# Altium PCB PanelDriver.PcbDoc
Units mm, origin at the board's own origin, x right, y up, seen from the top; angles counter-clockwise.
Board outline 65 x 44 mm, 2 copper layers (Top Layer, Bottom Layer), stack 1.58 mm thick; 74 components, 112 nets, 340 pads, 177 vias.
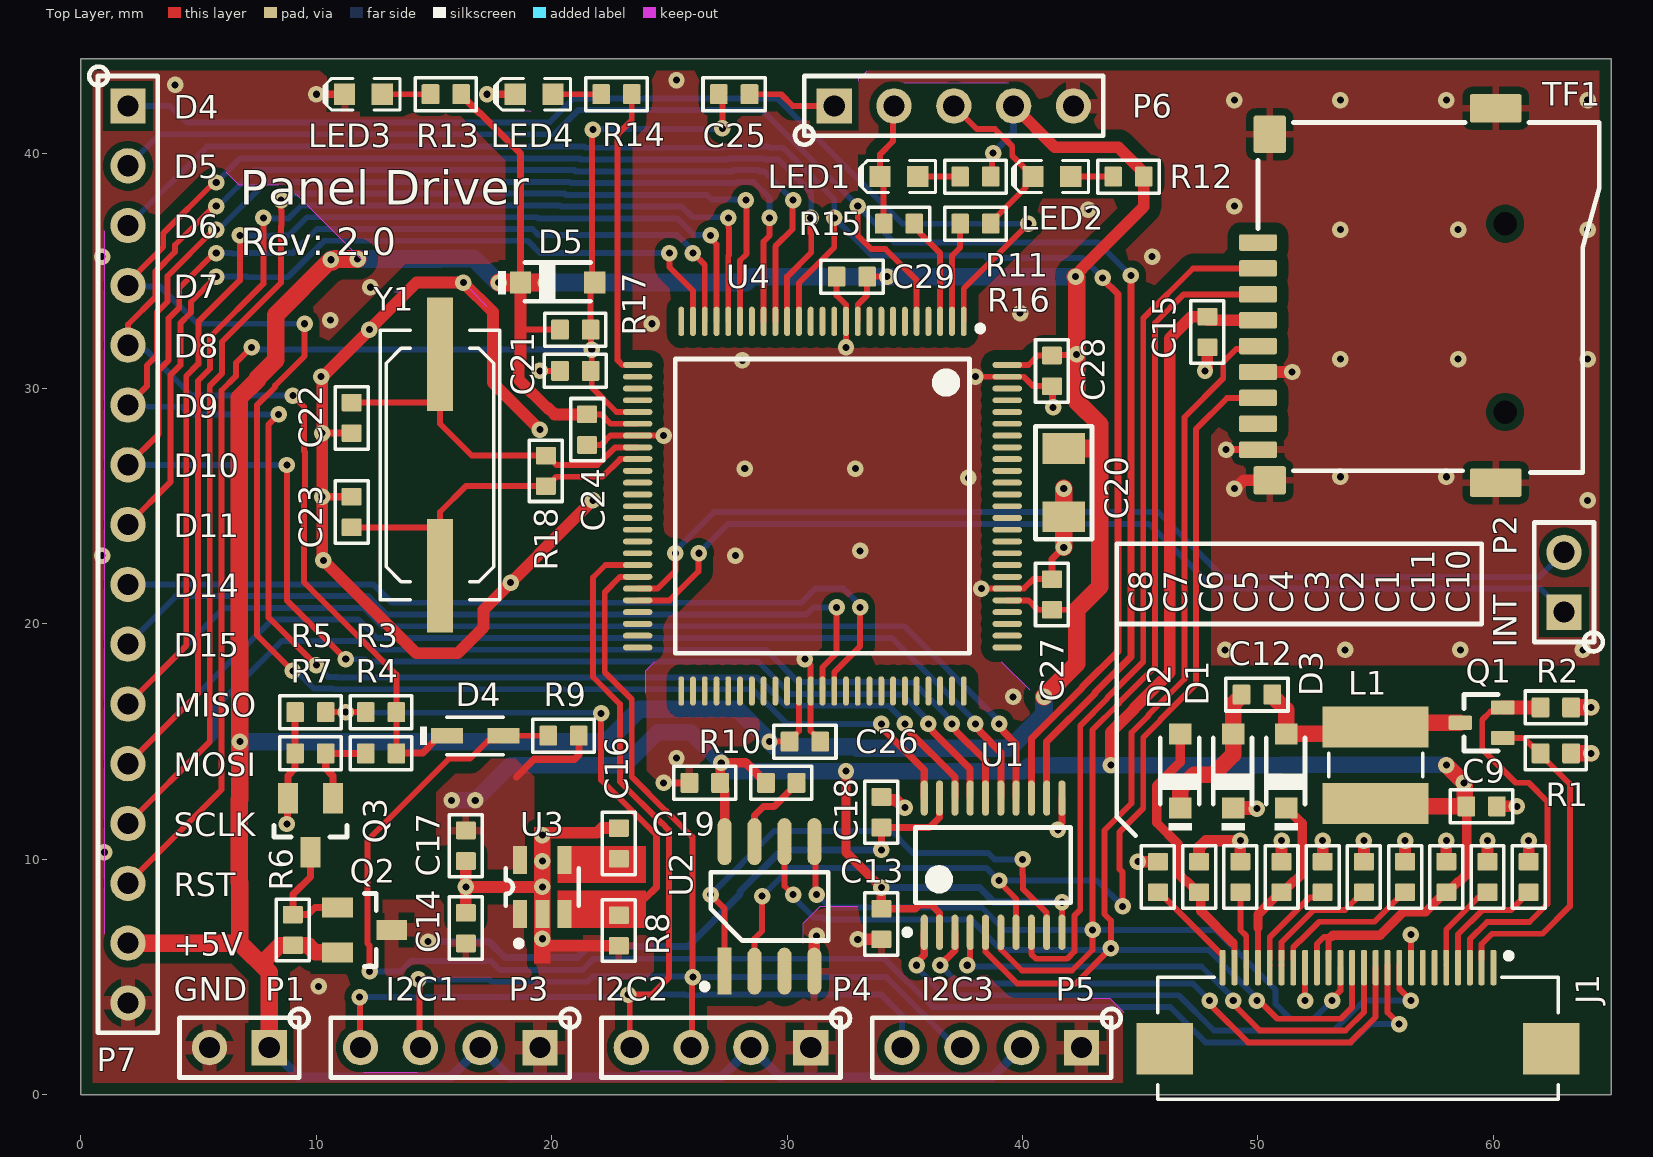
[diagram p0: Top Layer view]
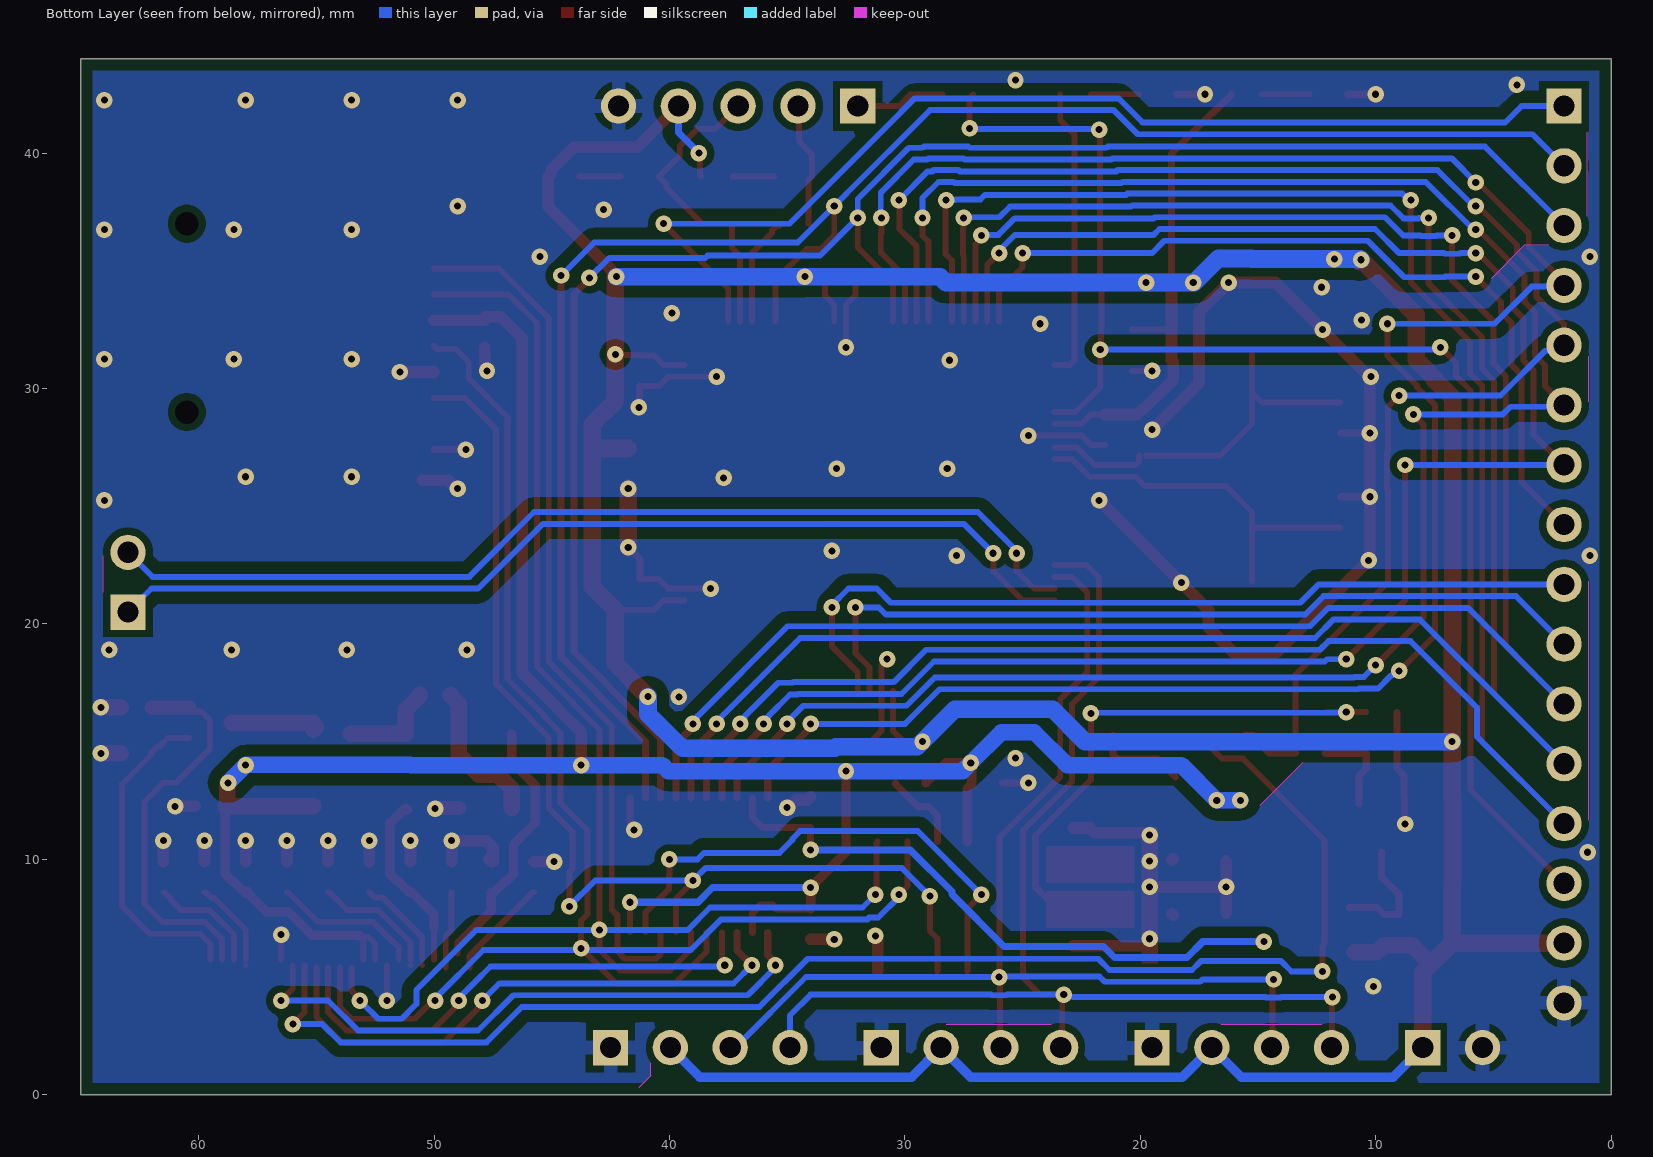
[diagram p1: Bottom Layer view, seen from below]
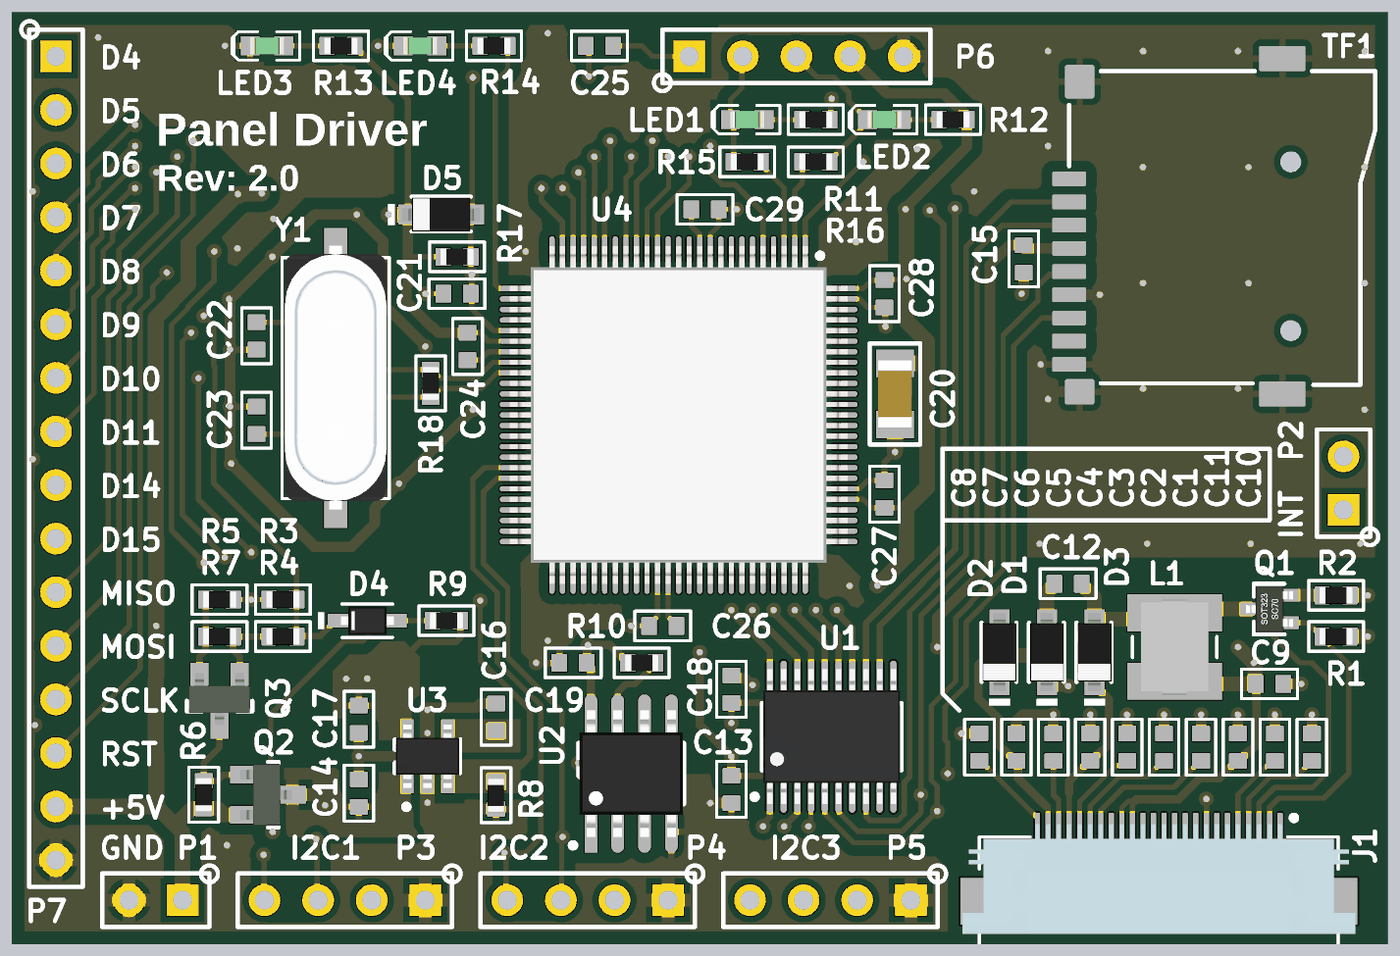
[diagram p2: 3D render of the assembled board from above, using the file's embedded part models]

## Layer stack, top to bottom
Top Solder: solder mask 0.01, Solder Resist, Dk 3.5
Top Layer: signal copper 0.035
Dielectric 1: core 1.51, FR-4, Dk 4.2
Bottom Layer: signal copper 0.035
Bottom Solder: solder mask 0.01, Solder Resist, Dk 3.5

## Board outline
0,0 0,44 65,44 65,0

## Design rules (kind name [scope] priority, off if disabled: settings)
BoardOutlineClearance BoardOutlineClearance_Exceptions [IsKeepOut or IsText or OnSilkscreen] p1: gap=0 ignorepadtopadclearanceinfootprint=FALSE
BoardOutlineClearance [All] p2: gap=0.5 ignorepadtopadclearanceinfootprint=FALSE
Clearance Clearance_KeepOut [IsKeepOut] p1: gap=0 ignorepadtopadclearanceinfootprint=FALSE
Clearance Clearance_All [All] p2: gap=0.3 ignorepadtopadclearanceinfootprint=TRUE except(0.25: Arc-Arc Arc-Track Arc-SMDPad Track-Track Track-SMDPad; 0.5: Track-Poly SMDPad-Poly)
ComponentClearance [All] p1: gap=0.25 collisioncheckmode=3 verticalgap=0.25 showdistances=FALSE
Height [All] p1: minheight=0 maxheight=100 prefheight=12.7
HoleSize [All] p1: absolutevalues=TRUE maxlimit=5 minlimit=0.3 maxpercent=80.000 minpercent=20.000
HoleToHoleClearance [All] p1: gap=0 allowstackedmicrovias=TRUE
MinimumSolderMaskSliver [All] p1: minsoldermaskwidth=0.099
PolygonConnect PolygonConnect_Direct [InComponentClass('Direct')] p1: connectstyle=Direct reliefconductorwidth=0.6 reliefentries=4 polygonreliefangle="90 Angle" airgapwidth=0.3
PolygonConnect PolygonConnect_Power [InComponentClass('Power')] p2: thpad.connectstyle=Relief thpad.reliefconductorwidth=0.6 thpad.reliefentries=4 thpad.polygonreliefangle="90 Angle" thpad.airgapwidth=0.3 smdpad.connectstyle=Relief smdpad.reliefconductorwidth=0.6 smdpad.reliefentries=4 smdpad.polygonreliefangle="90 Angle" smdpad.airgapwidth=0.3 via.connectstyle=Direct via.reliefconductorwidth=1 via.reliefentries=4 via.polygonreliefangle="90 Angle" via.airgapwidth=1
PolygonConnect PolygonConnect_All [All] p3: thpad.connectstyle=Relief thpad.reliefconductorwidth=0.3 thpad.reliefentries=4 thpad.polygonreliefangle="90 Angle" thpad.airgapwidth=0.3 smdpad.connectstyle=Relief smdpad.reliefconductorwidth=0.3 smdpad.reliefentries=4 smdpad.polygonreliefangle="90 Angle" smdpad.airgapwidth=0.3 via.connectstyle=Direct via.reliefconductorwidth=1 via.reliefentries=4 via.polygonreliefangle="90 Angle" via.airgapwidth=1
RoomDefinition PanelDriver [InComponentClass('PanelDriver')] p1: confinementstyle=ConfineIn formatcopy=TRUE lockcomponents=FALSE outline 88,-35 -12,-35 -12,65 88,65
RoutingVias [All] p1: holewidth=0.3 width=0.7 viastyle="Through Hole" minholewidth=0.3 minwidth=0.7 maxholewidth=0.3 maxwidth=0.7
SilkToSilkClearance [All] p1: silktosilkclearance=0.1
SilkToSolderMaskClearance [IsPad] p1: minsilkscreentomaskgap=0.1 clearancetoexposedcopper=TRUE
SolderMaskExpansion [All] p1: expansion=0.05 istentingtop=FALSE
Width [All] p1: maxlimit=10 minlimit=0.25 preferedwidth=0.3
23 further rules are at their usual default settings.

## Classes and differential pairs
net class Power: 3.3V +5 GND VCC
component class Power: C6 C12 L1 P1 P2 P3 P4 P5 P6 P7 Q2
component class Direct: U3

## Components (designator, comment, footprint, x,y, rotation, side; value= is the part's Value field where it differs from the comment)
C1 "100nF" C0603 58,9.25 r90 top
C2 "1uF" C0603 56.25,9.25 r90 top
C3 "1uF" C0603 54.5,9.25 r90 top
C4 "1uF" C0603 52.75,9.25 r90 top
C5 "1uF" C0603 51,9.25 r90 top
C6 "1uF" C0603 49.25,9.25 r90 top
C7 "1uF" C0603 47.5,9.25 r90 top
C8 "1uF" C0603 45.75,9.25 r90 top
C9 "4.7uF" C0603 59.5,12.25 r0 top
C10 "1uF" C0603 61.5,9.25 r90 top
C11 "1uF" C0603 59.75,9.25 r90 top
C12 "100nF" C0603 49.95,17 r0 top
C13 "100nF" C0603 34,7.25 r270 top
C14 "1uF" C0603 16.35,7.075 r270 top
C15 "100n" C0603 47.85,32.4 r90 top
C16 "22nF" C0603 22.85,10.675 r270 top
C17 "10uF" C0603 16.35,10.575 r90 top
C18 "100nF" C0603 34,12 r90 top
C19 "100n" C0603 26.5,13.25 r0 top
C20 "22uF" C1206 41.75,26 r90 top
C21 "0.1uF" C0603 21,30.75 r0 top
C22 "12pF" C0603 11.5,28.75 r270 top
C23 "12pF" C0603 11.5,24.75 r90 top
C24 "0.1uF" C0603 21.5,28.25 r90 top
C25 "0.1uF" C0603 27.75,42.5 r180 top
C26 "0.1uF" C0603 30.75,15 r180 top
C27 "0.1uF" C0603 41.25,21.25 r270 top
C28 "0.1uF" C0603 41.25,30.75 r90 top
C29 "0.1uF" C0603 32.75,34.75 r180 top
D1 "MBR0530" SOD123 48.95,13.75 r90 top
D2 "MBR0530" SOD123 46.7,13.75 r90 top
D3 "MBR0530" SOD123 51.2,13.75 r90 top
D4 "1N4148WS" SOD-323 16.75,15.25 r180 top
D5 "1N4148W" SOD123 20.25,34.5 r0 top
J1 "PFC24/0.5MM" PFC24/0.5MM 54.25,5.4 r0 top
L1 "68uH" CD43 55,14 r90 top
LED1 "GREEN" LED-0603-GREEN 34.75,39 r180 top
LED2 "GREEN" LED-0603-GREEN 41.25,39 r180 top
LED3 "GREEN" LED-0603-GREEN 12,42.5 r180 top
LED4 "GREEN" LED-0603-GREEN 19.25,42.5 r180 top
P1 "Header 2" HDR1X2 8,2 r180 top
P2 "Header 2" HDR1X2 63,20.5 r90 top
P3 "Header 4" HDR1X4 19.5,2 r180 top
P4 "Header 4" HDR1X4 31,2 r180 top
P5 "Header 4" HDR1X4 42.5,2 r180 top
P6 "Header 5" HDR1X5 32,42 r0 top
P7 "Header 16" HDR1X16 2,42 r270 top
Q1 "Si1308EDL" SOT323-3 59.5,15.8 r90 top
Q2 "AO3401" SOT-23 12,7 r180 top
Q3 "S8050" SOT-23 9.75,11.5 r90 top
R1 "10k" R0603 62.65,14.5 r0 top
R2 "3R" R0603 62.65,16.45 r0 top
R3 "1k" R0603 12.75,16.25 r0 top
R4 "1k" R0603 12.75,14.5 r180 top
R5 "47k" R0603 9.75,16.25 r0 top
R6 "100k" R0603 9,7 r90 top
R7 "47k" R0603 9.75,14.5 r0 top
R8 "100k" R0603 22.85,6.975 r270 top
R9 "1k" R0603 20.5,15.25 r0 top
R10 "1k" R0603 29.75,13.25 r0 top
R11 "6.8k" R0603 38,39 r180 top
R12 "6.8k" R0603 44.5,39 r180 top
R13 "1k" R0603 15.5,42.5 r180 top
R14 "10k" R0603 22.75,42.5 r180 top
R15 "22" R0603 34.75,37 r180 top
R16 "22" R0603 38,37 r0 top
R17 "10k" R0603 21,32.5 r180 top
R18 "1M" R0603 19.75,26.5 r270 top
TF1 "SD CARD" L-KLS1-TF-003-uSD 50,33 r90 top locked
U1 "TXS0108EPWR" TSSOP-20_0.65MM 38.75,9.75 r90 top
U2 "23LC1024" SO8 29.25,8 r90 top
U3 "RT9193" SOT23-5 19.6,8.825 r90 top
U4 "ATMEGA2560-16AU" TQFP100A 31.5,25 r270 top locked
Y1 "16MHz" HC-49/US-SMD 15.25,26.75 r270 top

## Footprints (in the part's own frame and the unit in brackets; to place one, negate y for a bottom-side part, rotate by r counter-clockwise, add the part's x,y. Pads: shape width x height; smd on the part's side, far side on the other; paste and mask are expansions set on the pad)
C0603 [mm] "Chip Resistor, 2-Leads, Body 1,60x0,85mm, IPC HIGH Density"
  rrect15% 0.75x0.85 smd: 1(-0.65,0) 2(0.65,0)
  silkscreen extent -1.33,-0.7 1.33,0.7, body extent -0.8,-0.4 0.8,0.41
C1206 [mm]
  rect 1.3x1.8 smd mask+0.05: 1(-1.45,0) 2(1.45,0)
  silkscreen extent -2.4,-1.2 2.4,1.2, body extent -1.6,-0.8 1.6,0.8, height 1
CD43 [mm]
  rect 1.75x4.5 smd: 1(-1.625,0) 2(1.625,0)
  silkscreen extent -0.5,-2 0.5,2, body extent -2.25,-1.6 2.25,1.6, height 3.2
HC-49/US-SMD [mil]
  rect 190x43.31 smd paste-0.22 mask+2: 1(-185,0) 2(185,0)
  silkscreen extent -225,-100 225,100, body extent -247,-94 245,94, height 158
HDR1X2 [mm] "Connector; Header; 2 Position"
  rect 1.5x1.5 hole 0.9: 1(0,0)
  round 1.5 hole 0.9: 2(2.54,0)
  silkscreen extent -1.67,-1.65 3.81,1.27
HDR1X4 [mm] "Connector; Header; 4 Position"
  rect 1.5x1.5 hole 0.9: 1(0,0)
  round 1.5 hole 0.9: 2(2.54,0) 3(5.08,0) 4(7.62,0)
  silkscreen extent -1.67,-1.65 8.89,1.27
HDR1X5 [mm] "Connector; Header; 5 Position"
  rect 1.5x1.5 hole 0.9: 1(0,0)
  round 1.5 hole 0.9: 2(2.54,0) 3(5.08,0) 4(7.62,0) 5(10.16,0)
  silkscreen extent -1.67,-1.65 11.43,1.27
HDR1X16 [mm] "Connector; Header; 16 Position"
  rect 1.5x1.5 hole 0.9: 1(0,0)
  round 1.5 hole 0.9: 2(2.54,0) 3(5.08,0) 4(7.62,0) 5(10.16,0) 6(12.7,0) 7(15.24,0) 8(17.78,0) 9(20.32,0) 10(22.86,0) 11(25.4,0) 12(27.94,0) 13(30.48,0) 14(33.02,0) 15(35.56,0) 16(38.1,0)
  silkscreen extent -1.67,-1.64 39.37,1.27
L-KLS1-TF-003-uSD [mm] "Secure Digital - microSD™ Surface Mount, Right Angle Gold"
  rrect19% 0.7x1.6 smd paste+0 mask+0: 1(3.2,0) 2(2.1,0) 3(1,0) 4(-0.1,0) 5(-1.2,0) 6(-2.3,0) 7(-3.4,0) 8(-4.5,0) 9(-5.6,0)
  rrect18% 1.2x1.4 smd paste+0 mask+0: 10(-6.9,-0.5)
  rrect18% 1.6x1.4 smd paste+0 mask+0: 11(7.8,-0.5)
  rrect14% 1.2x2.2 smd paste+0 mask+0: 12(8.9,-10.1) 13(-7,-10.1)
  round 0 hole 1 unplated paste+0 mask+0.05: 27(-4,-10.5) 28(4,-10.5)
  silkscreen extent -6.57,-14.5 8.3,0
LED-0603-GREEN [mm]
  round 0.254 on Mech15 mask+0.05: 0(0,0)
  rect 0.9x0.9 smd mask+0.05: 1(-0.8,0) 2(0.8,0)
  Top Layer pour cut-out: -0.5,0.5 0.5,0.5 0.5,-0.5 -0.5,-0.5
  silkscreen extent -1.55,-0.67 1.67,0.68, body extent -0.8,-0.4 0.8,0.4, height 0.75
PFC24/0.5MM [mm]
  rrect50% 0.25x1.5 smd paste+0 mask+0.075: 1(5.75,0) 2(5.25,0) 3(4.75,0) 4(4.25,0) 5(3.75,0) 6(3.25,0) 7(2.75,0) 8(2.25,0) 9(1.75,0) 10(1.25,0) 11(0.75,0) 12(0.25,0) 13(-0.25,0) 14(-0.75,0) 15(-1.25,0) 16(-1.75,0) 17(-2.25,0) 18(-2.75,0) 19(-3.25,0) 20(-3.75,0) 21(-4.25,0) 22(-4.75,0) 23(-5.25,0) 24(-5.75,0)
  rect 2.4x2.2 smd paste+0 mask+0.1: ""(-8.2,-3.45) ""(8.2,-3.45)
  silkscreen extent -8.5,-5.6 8.5,0.6, body extent -9.3,-5 9.3,0.2, height 2.15
R0603 [mm]
  rrect15% 0.75x0.85 smd: 1(-0.65,0) 2(0.65,0)
  silkscreen extent -1.3,-0.7 1.3,0.7, body extent -0.8,-0.4 0.8,0.4, height 0.55
SO8 [mm] "8-Pin Plastic Medium Body Small Outline Package 1.27 mm Pitch, IPC Medium Density"
  rect 2x0.6 smd: 1(-2.75,1.905)
  oval 2x0.6 smd: 2(-2.75,0.635) 3(-2.75,-0.635) 4(-2.75,-1.905) 5(2.75,-1.905) 6(2.75,-0.635) 7(2.75,0.635) 8(2.75,1.905)
  silkscreen extent -3.52,-2.5 1.45,2.88, body extent -3,-2.45 3,2.45, height 1.75
SOD123 [mm]
  rect 0.9x0.95 smd: 1(1.575,0) 2(-1.575,0)
  silkscreen extent -2.53,-0.8 1.4,0.85, body extent -1.85,-0.8 1.85,0.8, height 1.27
SOD-323 [mm]
  rect 1.35x0.65 smd mask+0.051: 1(-1.2,0) 2(1.2,0)
  silkscreen extent -1.2,-0.79 2.35,0.8, body extent -1.25,-0.67 1.25,0.68, height 1
SOT23-5 [mm]
  rect 1.2x0.591 smd mask+0.05: 1(-1.15,0.95) 2(-1.15,0) 3(-1.15,-0.95) 4(1.15,-0.95) 5(1.15,0.95)
  silkscreen extent -2.52,-1.55 0.8,1.55, body extent -1.5,-1.5 1.5,1.5, height 1.45
SOT323-3 [mm] "SMD, 2.2x2.2mm"
  rrect20% 0.6x1 smd: 1(-0.65,-0.9) 2(0.65,-0.9) 3(0,0.9)
  silkscreen extent -1.2,-0.7 1.2,0.75, body extent -1.1,-1.12 1.1,1.12, height 1.1
SOT-23 [mm] "SOT23, 3-Leads, Body 3,1x2,5mm (max), Pitch 0,95mm, IPC Medium Density"
  rect 1.3x0.85 smd: 1(1.1,-0.95) 2(1.1,0.95) 3(-1.2,0)
  silkscreen extent -0.55,-1.55 -0.05,1.55, body extent -1.21,-1.46 1.27,1.46, height 1
TQFP100A [mm] "Thin QFP, 100-Leads, Body 14x14mm, Pitch 0.5mm, IPC Medium Density"
  oval 1.25x0.25 smd mask+0.075: 1(-7.85,6) 2(-7.85,5.5) 3(-7.85,5) 4(-7.85,4.5) 5(-7.85,4) 6(-7.85,3.5) 7(-7.85,3) 8(-7.85,2.5) 9(-7.85,2) 10(-7.85,1.5) 11(-7.85,1) 12(-7.85,0.5) 13(-7.85,0) 14(-7.85,-0.5) 15(-7.85,-1) 16(-7.85,-1.5) 17(-7.85,-2) 18(-7.85,-2.5) 19(-7.85,-3) 20(-7.85,-3.5) 21(-7.85,-4) 22(-7.85,-4.5) 23(-7.85,-5) 24(-7.85,-5.5) 25(-7.85,-6) 51(7.85,-6) 52(7.85,-5.5) 53(7.85,-5) 54(7.85,-4.5) 55(7.85,-4) 56(7.85,-3.5) 57(7.85,-3) 58(7.85,-2.5) 59(7.85,-2) 60(7.85,-1.5) 61(7.85,-1) 62(7.85,-0.5) 63(7.85,0) 64(7.85,0.5) 65(7.85,1) 66(7.85,1.5) 67(7.85,2) 68(7.85,2.5) 69(7.85,3) 70(7.85,3.5) 71(7.85,4) 72(7.85,4.5) 73(7.85,5) 74(7.85,5.5) 75(7.85,6)
  oval 0.25x1.25 smd mask+0.075: 26(-6,-7.85) 27(-5.5,-7.85) 28(-5,-7.85) 29(-4.5,-7.85) 30(-4,-7.85) 31(-3.5,-7.85) 32(-3,-7.85) 33(-2.5,-7.85) 34(-2,-7.85) 35(-1.5,-7.85) 36(-1,-7.85) 37(-0.5,-7.85) 38(0,-7.85) 39(0.5,-7.85) 40(1,-7.85) 41(1.5,-7.85) 42(2,-7.85) 43(2.5,-7.85) 44(3,-7.85) 45(3.5,-7.85) 46(4,-7.85) 47(4.5,-7.85) 48(5,-7.85) 49(5.5,-7.85) 50(6,-7.85) 76(6,7.85) 77(5.5,7.85) 78(5,7.85) 79(4.5,7.85) 80(4,7.85) 81(3.5,7.85) 82(3,7.85) 83(2.5,7.85) 84(2,7.85) 85(1.5,7.85) 86(1,7.85) 87(0.5,7.85) 88(0,7.85) 89(-0.5,7.85) 90(-1,7.85) 91(-1.5,7.85) 92(-2,7.85) 93(-2.5,7.85) 94(-3,7.85) 95(-3.5,7.85) 96(-4,7.85) 97(-4.5,7.85) 98(-5,7.85) 99(-5.5,7.85) 100(-6,7.85)
  silkscreen extent -7.67,-6.25 6.25,6.83, body extent -8,-8 8,8, height 1.61
TSSOP-20_0.65MM [mm] "TSOP, 20-Leads, Body 6.5x4.4mm, Pitch 0.65mm, IPC Medium Density"
  oval 1.5x0.3 smd mask+0.1: 1(-2.85,2.925) 2(-2.85,2.275) 3(-2.85,1.625) 4(-2.85,0.975) 5(-2.85,0.325) 6(-2.85,-0.325) 7(-2.85,-0.975) 8(-2.85,-1.625) 9(-2.85,-2.275) 10(-2.85,-2.925) 11(2.85,-2.925) 12(2.85,-2.275) 13(2.85,-1.625) 14(2.85,-0.975) 15(2.85,-0.325) 16(2.85,0.325) 17(2.85,0.975) 18(2.85,1.625) 19(2.85,2.275) 20(2.85,2.925)
  silkscreen extent -2.97,-3.3 1.6,3.77, body extent -3.2,-3.25 3.2,3.25, height 1.2

## Part data
C1 C2 C3 C4 C5 C6 C7 C8 C9 C10 C11 C12 C13 C14 C15 C18 C19: library part C, "Capacitor", Manufacturer=Any, Manufacturer Part Number=Any
C16 C17: library part C_100uF_6.3V_1206, "Capacitor", Manufacturer=Any, Voltage=6.3V, Chip-Dip Link=https://www.chipdip.ru/product0/8015829745, Manufacturer Part Number=Any, Parameter 1=85
C20: library part C, "16V 22uF X7R ±10% 1206  Multilayer Ceramic Capacitors MLCC - SMD/SMT ROHS", Manufacturer=Any, Manufacturer Part Number=Any
C21 C24 C25 C26 C27 C29: library part C, "25V 100nF X7R ±10% 0603  Multilayer Ceramic Capacitors MLCC - SMD/SMT ROHS", Manufacturer=Any, Manufacturer Part Number=Any
C22 C23: library part C_100uF_6.3V_1206, "50V 22pF X7R ±10% 0603  Multilayer Ceramic Capacitors MLCC - SMD/SMT ROHS", Manufacturer=Any, Voltage=6.3V, Chip-Dip Link=https://www.chipdip.ru/product0/8015829745, Manufacturer Part Number=Any, Parameter 1=85
C28: library part C, "25V 100nF X7R ±10% 0603  Multilayer Ceramic Capacitors MLCC - SMD/SMT ROHS", JLCPCB Part Number=C307361, Manufacturer=Any, JLCPCB Price=0.02, Manufacturer Part Number=Any
D1 D2 D3 D4: library part SS14F, Manufacture=UMF, Manufacturer=Any, Chip-Dip Link=https://www.chipdip.ru/product/ss14f, Price=4
  D1 D2 D3: Manufacturer Part Number=MBR0530
  D4: Manufacturer Part Number=1N4148WS
D5: library part SS14F, "1N4148W-E3-08, Rectifier Diode Small Signal Switching Si 100V 0.15A 4ns 2-Pin SOD-123 T/R", Manufacture=Any, Manufacturer=Any, Manufacturer Part Number=Any, Price=4
J1: library part "PFC24/0.5MMHeader 24", "24 Position FFC, FPC Connector Contacts, Bottom 0.020\" (0.50mm) Surface Mount, Right Angle", Manufacturer=MOLEX, Manufacturer Part Number=0524372471, LatestRevisionDate=17-Jul-2002, LatestRevisionNote="Re-released for DXP Platform.", Publisher="Altium Limited"
L1: library part IND, "SMD, 4x4mm  Inductor", Manufacturer=Any, Chip-Dip Link=https://www.chipdip.ru/product/lqh55dn470m, Manufacturer Part Number=Any, Price=110
LED1 LED2 LED3 LED4: library part LED, "0603  Light Emitting Diodes (LED) ROHS", JLCPCB Part Number=C965812, Manufacturer=Any, JLCPCB Price=0.005, Manufacturer Part Number=Any
P1 P2: "Header, 2-Pin", LatestRevisionDate=17-Jul-2002, LatestRevisionNote="Re-released for DXP Platform.", Publisher="Altium Limited"
P3 P4 P5: "Header, 4-Pin", LatestRevisionDate=17-Jul-2002, LatestRevisionNote="Re-released for DXP Platform.", Publisher="Altium Limited"
P6: "Header, 5-Pin", Manufacturer=Any, LatestRevisionDate=17-Jul-2002, LatestRevisionNote="Re-released for DXP Platform.", Manufacturer Part Number=Any, Publisher="Altium Limited"
P7: "Header, 16-Pin", LatestRevisionDate=17-Jul-2002, LatestRevisionNote="Re-released for DXP Platform.", Publisher="Altium Limited"
Q1 U1 U2 U3: Manufacturer=Any
  Q1: Manufacturer Part Number=Si1308EDL, PartNumber=Si1308EDL
  U1: Chip-Dip Link=https://www.platan.ru/cgi-bin/qwery.pl/id=944671602, Manufacturer Part Number=TXS0108EPWR, Price=290
  U2: Chip-Dip Link=https://www.chipdip.ru/product/max485esa-umw, Manufacturer Part Number=23LC1024, Price=46
  U3: Chip-Dip Link=https://www.chipdip.ru/product/xl1509e-5.0, Manufacturer Part Number=RT9193, Price=34
Q2: library part ZXMP6A13FTA, Current - Continuous Drain (Id) @ 25°C="900mA (Ta)", Drain to Source Voltage (Vdss)=60V, Input Capacitance (Ciss) @ Vds="219pF @ 30V", Manufacturer=Any, Package / Case="TO-236-3, SC-59, SOT-23-3", Power - Max=625mW, Supplier Device Package=SOT-23-3, Supplier Part Number 1=ZXMP6A13FCT-ND, Category="Discrete Semiconductor Products", ComponentLink1Description=http://www.diodes.com/_files/datasheets/ZXMP6A13F.pdf, ComponentLink1URL=http://www.diodes.com/_files/datasheets/ZXMP6A13F.pdf, FET Feature=Standard, FET Type="MOSFET P-Channel, Metal Oxide", Gate Charge (Qg) @ Vgs="5.9nC @ 10V", Manufacturer Part Number=AO3401, Mounting Type="Surface Mount", Packaging="Cut Tape (CT)", Pricing 1="1=0.54, 10=0.464, 100=0.3468, 500=0.2724, 1000=0.21 (USD)", Rds On (Max) @ Id, Vgs="400 mOhm @ 900mA, 10V", RoHS="RoHS Compliant", Stock 1=70275, Supplier 1=Digi-Key, Vgs(th) (Max) @ Id="1V @ 250µA"
Q3: library part NPN_BJT, Manufacturer=Any, Manufacturer Part Number=S8050
R1 R2 R3 R4 R5 R6 R7 R8 R9 R10: library part R, "Resistor", Manufacturer=Any, Manufacturer Part Number=Any
R11 R12: library part R, "125mW Thick Film Resistors ±100ppm/℃ ±5% 6.8kΩ 0603  Chip Resistor - Surface Mount ROHS", JLCPCB Part Number=C100046, Manufacturer=Any, JLCPCB Price=0.002, Manufacturer Part Number=Any
R13: library part R, "125mW Thick Film Resistors ±100ppm/℃ ±5% 1kΩ 0603  Chip Resistor - Surface Mount ROHS", JLCPCB Part Number=C100046, Manufacturer=Any, JLCPCB Price=0.002, Manufacturer Part Number=Any
R14: library part R, "125mW Thick Film Resistors ±100ppm/℃ ±5% 10kΩ 0603  Chip Resistor - Surface Mount ROHS", JLCPCB Part Number=C100046, Manufacturer=Any, JLCPCB Price=0.002, Manufacturer Part Number=Any
R15 R16: library part R, "125mW Thick Film Resistors ±100ppm/℃ ±5% 22Ω 0603  Chip Resistor - Surface Mount ROHS", Manufacturer=Any, Manufacturer Part Number=Any
R17: library part R, "125mW Thick Film Resistors ±100ppm/℃ ±5% 10kΩ 0603  Chip Resistor - Surface Mount ROHS", Manufacturer=Any, Manufacturer Part Number=Any
R18: library part R, "125mW Thick Film Resistors ±100ppm/℃ ±5% 1M 0603  Chip Resistor - Surface Mount ROHS", Manufacturer=Any, Manufacturer Part Number=Any
TF1: "SDCARD", Manufacturer="KLS electronic co ltd", Manufacturer Part Number=L-KLS1-TF-003-uSD, PartNumber=693071010811, Supplier Part Number 1=732-3819-2-ND, Price=3,3, Supplier 1=Digi-Key
U4: "256KB 4.5V~5.5V AVR 8KB 16MHz FLASH 86 TQFP-100(14x14)  Microcontroller Units (MCUs/MPUs/SOCs) ROHS", Manufacturer="Microchip Tech", Manufacturer Part Number=ATMEGA2560-16AU
Y1: library part Crystal-16MHz, "Crystal 16MHz 12pF SMD", Manufacturer=Any, Manufacturer Part Number=Any

## Via types
v1: diameter 0.7, hole 0.3, Top Layer to Bottom Layer, tented both sides, 177 vias

## Nets (pads, with @x,y where several pads share a name; then routed paths per layer and width w, separated by ;. In a path a pad name is that pad's centre, name@x,y a point inside that pad or via, vN(x,y) a via of type N, cw(c..) or ccw(c..) an arc to the next point about the centre after c; other vN are vias at no path point)
3.3V: C1.1 C9.1 C13.1 C15.2 C17.2 C19.2 J1.15 J1.16 L1.1 R9.2 R10.1 TF1.4 U1.2 U1.10 U2.8 U3.5 | length 115.6
  Top Layer w0.25: U1.10 v1(41.675,8.175) ; J1.16@52.5,5.75 52.5,6.4 52.8,6.7 53.1,6.7 53,6.6 J1.15@53,5.75
  Top Layer w0.3: 18.5,13.5 19.25,14.25 20.974,14.25 21.15,14.426 R9.2 ; C13.1 35.447,7.9 35.597,8.05 36.149,8.05 36.475,7.724 U1.2
  Top Layer w0.4: U2.8 27.345,13.005 27.15,13.2 27.15,14.05 v1(27.2,14.1) 28.25,14.1 28.875,13.475 28.925,13.475 29.1,13.3 R10.1 ; v1@32.5,13.8 32.5,10.3 v1(34,8.8) C13.1 ; 53.1,6.7 53.175,6.775 55.188,6.775 56.188,7.775 57.125,7.775 C1.1@57.95,8.6 ; L1.1 L1.1@55.125,12.25 ; C1.1@58.05,8.6 58.525,9.075 58.578,9.075 58.875,9.372 C9.1@58.875,12.2 ; C9.1@58.85,12.2 C9.1
  Top Layer w0.5: U3.5@18.605,10.02 U3.5 ; v1(43.75,14) 43.75,15.389 44.725,16.364 44.725,16.396 46.25,17.921 46.25,32.125 47.175,33.05 C15.2 ; C15.2@47.85,32.9 TF1.4 ; C1.1@57.95,8.6 C1.1 ; v1(58.75,13.25) v1@58.788,13.212 ; C9.1@58.788,12.312 C9.1
  Top Layer w0.7: L1.1@55.125,12.25 C9.1 ; v1(58,14) v1(58.75,13.25) ; C9.1@58.788,12.312 v1@58.788,13.212
  Bottom Layer w0.3: v1(34,8.8) 38.169,8.8 38.794,8.175 v1(41.675,8.175)
  Bottom Layer w0.7: v1(15.75,12.5) v1(16.75,12.5) 18.25,14 23.1,14 24.5,15.4 25.9,15.4 v1(27.2,14.1) 27.55,13.75 40.05,13.75 40.3,14 50.993,14 51,14.007 57.993,14.007 v1(58,14) v1(58.75,13.25)
  other v1: 32.5,13.75
+5: C20.2 C24.2 C26.2 C27.2 C28.2 C29.1 D5.2 P1.1 P3.2 P4.2 P5.2 P6.4 P7.15 Q2.2 R6.1 R11.1 R12.1 R13.1 R17.2 U4.10 U4.31 U4.61 U4.80 U4.100 | length 220.9
  Top Layer w0.25: 18.7,32.5 R17.2 ; C24.2 22.1,28.9 22.5,28.5 U4.31 ; v1(29.25,15) 30.05,15 30.35,15.3 30.354,15.3 30.5,15.446 U4.61 ; U4.10 33,33.557 33.4,33.957 C29.1 v1(34.25,34.75) ; R11.1 38.7,39.05 38.7,39.95 v1(38.75,40) ; U4.80 40.25,21 40.65,20.6 C27.2 42.3,20.6 ; U4.100 40.25,31 40.65,31.4 C28.2 41.275,31.425 42.275,31.425 v1(42.3,31.45) ; R12.1@45.075,39.075 R12.1
  Top Layer w0.3: R13.1 16.15,42.45 16.375,42.225 16.394,42.225 16.919,41.7 16.95,41.7 18.675,39.975 D5.2
  Top Layer w0.5: D5.2 18.675,31.198 18.6,31.123 18.6,30.377 19.827,29.15 19.873,29.15 20.123,28.9 C24.2 ; P6.4 41.37,40.25 44.074,40.25 45.025,39.299 45.025,39.125 R12.1@45.075,39.075 ; v1(42.25,34.75) 42.25,34.804 42.5,35.054 42.5,35.073 45.15,37.723 R12.1
  Top Layer w0.7: 7.7,5.6 8.45,6.35 R6.1 9.65,6.35 9.95,6.05 Q2.2
  Top Layer w0.75: P7.15 6.75,6.44 6.75,9 6.725,9.025 6.725,12.525 6.75,12.55 v1(6.75,15) 6.75,19.189 6.725,19.214 6.725,29.6 7.5,30.375 7.5,30.434 8.275,31.209 8.275,33.124 v1(10.62,35.469) ; 6.755,6.445 8,5.2 P1.1 ; v1@10.695,35.394 10.8,35.5 v1(11.75,35.5) ; v1(17.75,34.5) D5.2 ; D5.2@18.725,34.55 D5.2 ; v1(19.75,34.5) D5.2 ; v1(40.912,16.912) 42.3,18.3 42.3,20.6 43.275,21.575 43.275,27.5 ; C20.2 43.225,27.45 43.275,27.5 ; v1(42.25,34.75) 42.3,34.7 v1(42.3,31.45) 42.3,29.45 43.275,28.475 43.275,27.5
  Bottom Layer w0.3: v1(38.75,40) 39.62,40.87 P6.4
  Bottom Layer w0.4: P1.1 9.25,0.75 15.71,0.75 P3.2 18.21,0.75 27.21,0.75 P4.2 29.71,0.75 38.71,0.75 P5.2
  Bottom Layer w0.75: v1(6.75,15) 22.35,15 23.725,16.375 27.875,16.375 29.475,14.775 32.925,14.775 32.975,14.725 39.425,14.725 39.5,14.8 39.547,14.8 40.912,16.164 v1(40.912,16.912) ; v1@10.793,35.469 v1(10.62,35.469) 10.651,35.5 v1(11.75,35.5) 15.25,35.5 15.275,35.525 16.675,35.525 17.7,34.5 v1(17.75,34.5) v1(19.75,34.5) 28.25,34.5 28.5,34.75 v1(34.25,34.75) v1(42.25,34.75)
A0: U4.97
A1: U4.96
A2: U4.95
A3: U4.94
A4: U4.93
A5: U4.92
A6: U4.91
A7: U4.90
A8: U4.89
A9: U4.88
A10: U4.87
A11: U4.86
A12: U4.85
A13: U4.84
A14: U4.83
A15: U4.82
AREF: U4.98
CLK: J1.13 TF1.5 U1.5 U2.6 | length 66.7
  Top Layer w0.25: U2.6 29.885,8.865 v1(30.25,8.5) ; U1.5 38.425,6.075 39.775,4.725 42.257,4.725 v1(43.75,6.218) 43.75,7.404 43.475,7.679 43.475,11.225 44.625,12.375 44.625,15.38 45.35,16.105 45.35,16.137 46.875,17.662 46.875,28.779 48.525,30.429 48.525,31.128 49.075,31.678 49.878,31.678 TF1.5 ; v1@49.862,4.188 50.825,3.225 53.511,3.225 54,3.714 J1.13
  Bottom Layer w0.25: v1@30.202,8.452 31.129,7.525 31.518,7.525 31.593,7.45 37.8,7.45 39.099,6.151 43.75,6.151 47.895,6.151 49.95,4.096 v1(49.95,4)
D0: R16.1 U4.2 | length 4.3
  Top Layer w0.25: U4.2 37,35.643 37.35,35.993 R16.1
D1: R15.1 U4.3 | length 4.6
  Top Layer w0.25: R15.1@35.346,36.904 35.446,36.904 35.65,36.7 35.65,36.6 36.5,35.75 U4.3
D2: U4.6
D3: U4.7
D4: P7.1 U4.1 | length 46.5
  Top Layer w0.25: U4.1 37.5,34.25 v1(40.25,37)
  Bottom Layer w0.25: P7.1 3.8,42 4.5,41.3 19.9,41.3 20.925,42.325 29.574,42.325 30.825,41.074 34.899,37 v1(40.25,37)
D5: P7.2 U1.12 U4.5 | length 76.5
  Top Layer w0.25: v1(33,37.75) 33,36.5 33.577,35.923 34.173,35.923 35.5,34.596 U4.5
  Top Layer w0.3: U1.12 41.025,14.997 43.075,17.047 43.075,17.08 44.6,18.605 v1(44.6,34.8)
  Bottom Layer w0.25: P7.2 3.34,40.8 20.107,40.8 21.132,41.825 28.935,41.825 32.5,38.26 32.5,38.25 v1(33,37.75) 34.55,36.2 43.2,36.2 v1(44.6,34.8)
D6: P7.3 U1.13 U4.15 | length 74.5
  Top Layer w0.25: U4.15 30.5,34.489 32,35.989 v1(32,37.25)
  Top Layer w0.3: U1.13 40.375,15.125 42.525,17.275 42.525,17.308 44.05,18.833 44.05,34.006 43.4,34.656 v1(43.4,34.7)
  Bottom Layer w0.25: P7.3 5.355,40.275 21.379,40.275 21.429,40.225 27.258,40.225 27.308,40.275 29.192,40.275 29.242,40.225 29.828,40.225 32,38.053 v1(32,37.25) 33.6,35.65 38.38,35.65 38.48,35.55 42.55,35.55 v1(43.4,34.7)
D7: P7.4 U1.20 U4.16 | length 92.5
  Top Layer w0.25: P7.4 2,34.51 3.5,36.01 3.5,36.596 5.654,38.75 v1(5.75,38.75) ; v1(9,18) 7.475,19.525 7.475,29.289 8.25,30.064 8.25,30.123 9.5,31.373 v1(9.5,32.75) ; U4.16 30,34.75 31.025,35.775 31.025,36.571 31,36.596 v1(31,37.25)
  Top Layer w0.3: v1(34,15.75) 34.077,15.673 34.077,15.542 35.825,13.794 U1.20
  Bottom Layer w0.25: P7.4 2.055,34.325 3.375,34.325 4.95,32.75 v1(9.5,32.75) ; v1(5.75,38.75) 6.775,39.775 21.172,39.775 21.222,39.725 27.465,39.725 27.515,39.775 28.985,39.775 29.035,39.725 29.621,39.725 31.025,38.321 31.025,37.275 v1(31,37.25) ; v1(9,18) 9.122,18 9.307,17.814 9.34,17.814 9.904,17.25 10.697,17.25 10.722,17.225 28.525,17.225 30,15.75 v1(34,15.75)
D8: D4.2 P7.5 R3.2 R4.1 U4.17 | length 66.1
  Top Layer w0.25: P7.5 2,32.718 3.175,33.893 3.175,34.978 4,35.803 4,36.096 5.654,37.75 v1(5.75,37.75) ; v1(9,29.7) 9.475,29.225 9.475,27.35 9.525,27.3 9.525,25.771 9.475,25.721 9.475,21.775 13.4,17.85 R3.2 13.4,14.525 R4.1 ; U4.17 29.5,36.038 30.225,36.763 30.225,37.975 v1(30.25,38)
  Top Layer w0.3: R4.1@13.4,14.525 14.525,14.525 15.025,15.025 15.025,15.075 15.2,15.25 D4.2
  Bottom Layer w0.25: P7.5 2.239,31.601 2.799,31.601 4.7,29.7 v1(9,29.7) ; v1(5.75,37.75) 5.846,37.75 7.371,39.275 20.965,39.275 21.015,39.225 27.672,39.225 27.722,39.275 28.778,39.275 28.828,39.225 29.025,39.225 v1(30.25,38)
D9: P7.6 U1.18 U4.18 | length 87.4
  Top Layer w0.25: P7.6 2.8,30.1 2.8,30.978 3.225,31.403 3.225,33.236 3.675,33.686 3.675,34.771 5.654,36.75 v1(5.75,36.75) ; v1(8.4,28.9) 7.975,28.475 7.975,20.275 v1(10,18.25) ; U4.18 29,36.245 29.25,36.495 v1(29.25,37.25)
  Top Layer w0.3: v1(35,15.75) 35,15.642 35.2,15.442 35.2,15.419 37.125,13.494 U1.18
  Bottom Layer w0.25: P7.6 2.075,29.225 4.275,29.225 4.6,28.9 v1(8.4,28.9) ; v1(5.75,36.75) 5.846,36.75 7.871,38.775 20.758,38.775 20.808,38.725 27.879,38.725 27.929,38.775 28.571,38.775 29.25,38.096 v1(29.25,37.25) ; v1(10,18.25) 10.5,17.75 10.904,17.75 10.929,17.725 28.732,17.725 29.932,16.525 34.321,16.525 35,15.846 v1(35,15.75)
D10: P7.7 U1.17 U4.23 | length 80.8
  Top Layer w0.25: P7.7 3.3,28.06 3.3,30.771 3.725,31.196 3.725,32.982 4.175,33.432 4.175,34.271 5.654,35.75 v1(5.75,35.75) ; v1(8.75,26.75) 8.75,21 v1(11.25,18.5) ; v1(26,35.75) 26.5,35.25 U4.23
  Top Layer w0.3: v1(36,15.75) 36,15.642 36.2,15.442 36.2,15.419 37.775,13.844 U1.17
  Bottom Layer w0.25: P7.7 2.005,26.755 8.745,26.755 v1(8.75,26.75) ; v1(5.75,35.75) 6.404,35.75 6.429,35.725 7.071,35.725 7.096,35.75 9,35.75 10.025,36.775 14.757,36.775 19.182,36.775 19.432,36.525 25.321,36.525 26,35.846 v1(26,35.75) ; v1(11.25,18.5) 12.064,18.5 12.164,18.4 28.764,18.4 30.139,17.025 34.528,17.025 34.553,17 34.881,17 35.8,16.081 35.8,16.058 36,15.858 v1(36,15.75)
D11: P7.8 U4.24 | length 35.5
  Top Layer w0.25: P7.8 3.8,26.02 3.8,30.564 4.225,30.989 4.225,32.775 4.675,33.225 4.675,33.675 v1(5.75,34.75) ; v1(25,35.75) 25,35.154 26,34.154 U4.24
  Bottom Layer w0.25: v1(5.75,34.75) 7.043,34.75 7.068,34.725 8.78,34.725 10.33,36.275 14.964,36.275 18.975,36.275 19.5,35.75 v1(25,35.75)
D12: U4.25
D13: R14.1 U4.26 | length 12.5
  Top Layer w0.25: R14.1 23.4,41.4 22.8,40.8 22.8,31.2 23,31 U4.26
D14: P7.9 U4.64 | length 36.1
  Top Layer w0.25: U4.64 32,17.947 33.1,19.047 v1(33.1,20.7)
  Bottom Layer w0.25: P7.9 12.42,21.68 13.2,20.9 30.6,20.9 31.2,21.5 32.396,21.5 33.1,20.796 v1(33.1,20.7)
D15: P7.10 U4.63 | length 35.2
  Top Layer w0.25: U4.63 31.5,18.154 32.1,18.754 v1(32.1,20.7)
  Bottom Layer w0.25: P7.10 4.04,21.18 12.213,21.18 12.993,20.4 30.807,20.4 31.107,20.7 v1(32.1,20.7)
D16: U4.13
D17: U4.12
D18: P2.1 U4.46 | length 42.7
  Top Layer w0.25: U4.46 25,21 26.232,22.232 26.232,22.982 v1(26.25,23)
  Bottom Layer w0.25: v1(26.25,23) 27.5,24.25 45.375,24.25 48.125,21.5 62,21.5 P2.1
D19: P2.2 U4.45 | length 42.8
  Top Layer w0.25: U4.45 24.5,21.5 25.25,22.25 v1(25.25,23)
  Bottom Layer w0.25: v1@25.205,22.955 25.205,23.051 26.904,24.75 45.75,24.75 48.5,22 61.96,22 P2.2
D20: P3.3 P4.3 P5.3 U4.44 | length 50.1
  Top Layer w0.25: v1(14.336,4.9) 14.378,4.858 14.378,2.042 P3.3 ; U4.44 22.9,22 22.25,21.35 22.25,17.95 23.4,16.8 23.4,13.504 24.857,12.047 24.875,12.047 25.975,10.947 25.975,5.025 v1(26,5) 25.96,4.96 25.96,2.04 P4.3 ; P5.3 P5.3@37.42,2.04
  Bottom Layer w0.25: v1(14.336,4.9) 17.357,4.9 17.457,4.8 21.512,4.8 21.737,5.025 25.975,5.025 v1(26,5) 34.197,5 37.157,2.04 P5.3@37.46,2.04
D21: P3.4 P4.4 P5.4 U4.43 | length 51.8
  Top Layer w0.25: v1(11.836,4.15) 11.858,4.128 11.858,2.022 P3.4 ; P4.4 23.315,2.065 23.315,4.185 v1(23.25,4.25) 24.25,4.25 24.975,4.975 24.975,11.24 24.667,11.547 24.649,11.547 22.9,13.297 22.9,16.593 21.75,17.743 21.75,21.97 22.28,22.5 U4.43
  Bottom Layer w0.25: v1(11.836,4.15) 13.99,4.15 14.015,4.125 14.657,4.125 14.682,4.15 22.879,4.15 22.892,4.164 23.164,4.164 v1(23.25,4.25) 25.654,4.25 25.679,4.225 26.321,4.225 26.346,4.25 34,4.25 34.88,3.37 P5.4
D22: U4.78
D23: U4.77
D24: U4.76
D25: U4.75
D26: U4.74
D27: U4.73
D28: U4.72
D29: U4.71
D30: U4.60
D31: U4.59
D32: U4.58
D33: U4.57
D34: U4.56
D35: U4.55
D36: U4.54
D37: U4.53
D38: U4.50
D39: U4.70
D40: U4.52
D41: U4.51
D42: U4.42
D43: U4.41
D44: U4.40
D45: U4.39
D46: U4.38
D47: U4.37
D48: U4.36
D49: U4.35
DIN: J1.14 TF1.3 U1.6 U2.5 | length 66.5
  Top Layer w0.25: U2.5 31.203,10.703 31.203,8.547 v1(31.25,8.5) ; U1.6 39.085,6.89 39.085,6.165 39.975,5.275 42.1,5.275 42.975,6.15 v1(42.975,7) 42.975,15.498 44.1,16.623 44.1,16.655 45.625,18.18 45.625,32.782 46.843,34 TF1.3 ; v1(53.15,4) 53.15,4.067 53.5,4.417 J1.14
  Bottom Layer w0.25: v1(31.25,8.5) 31.8,7.95 38.276,7.95 39.226,7 v1(42.975,7) 48.2,7 50.75,4.45 50.75,3.85 51.375,3.225 52.375,3.225 53.064,3.914 v1@53.064,3.986
DOUT: TF1.7 U1.7 U2.2 | length 47.2
  Top Layer w0.25: U2.2 28.615,6.635 28.939,6.959 v1(28.939,8.439) ; v1(39,9.1) 39,9.047 39.725,8.322 U1.7 ; v1(44.25,8) 44.25,9.454 44.125,9.579 44.125,11.168 45.125,12.168 45.125,15.173 45.85,15.898 45.85,15.93 47.375,17.455 47.375,28.284 48.691,29.6 TF1.7
  Bottom Layer w0.25: v1(28.939,8.439) 30.125,9.625 38.475,9.625 v1(39,9.1) 43.15,9.1 v1(44.25,8)
EPD_BUSY: J1.9 U1.1 | length 26
  Top Layer w0.25: J1.9@56,5.5 J1.9 56,4.5 v1(56.5,4)
  Top Layer w0.3: v1(35.5,5.5) 35.5,5.608 35.825,5.933 U1.1
  Bottom Layer w0.25: v1(35.5,5.5) 35.5,5.404 36.679,4.225 46.629,4.225 48.129,2.725 53.225,2.725 54.5,4 v1(56.5,4)
EPD_CS: J1.12 U1.4 | length 21.5
  Top Layer w0.25: v1@37.75,5.5 37.765,5.515 37.765,6.89 U1.4 ; v1@48.95,3.904 v1(48.95,4) ; v1@49.043,3.757 50.075,2.725 53.718,2.725 54.5,3.507 J1.12
  Bottom Layer w0.25: v1(37.65,5.5) 37.707,5.443 47.603,5.443 48.271,4.775 48.95,4.096 v1@48.95,4.05
EPD_DC: J1.11 U1.3 | length 24
  Top Layer w0.25: v1@47.95,3.904 v1(47.95,4) ; v1@48.015,3.785 49.575,2.225 53.925,2.225 55,3.3 J1.11
  Top Layer w0.3: v1(36.5,5.5) 37.125,6.125 U1.3
  Bottom Layer w0.25: v1(36.5,5.5) 37.275,4.725 47.225,4.725 47.9,4.05 v1@47.9,4
EPD_RST: D4.1 J1.10 R9.1 | length 63.9
  Top Layer w0.25: v1(12.263,5.237) 12.263,6.332 12.175,6.42 12.175,10.816 15.634,14.275 16.525,14.275 17.3,15.05 17.75,15.05 D4.1 R9.1 ; J1.10@55.5,5.5 55.5,3.5 v1(56,3)
  Bottom Layer w0.25: v1(12.263,5.237) 13.577,5.237 14.015,5.675 17.427,5.675 17.802,5.3 21.305,5.3 21.78,5.775 34.129,5.775 36.179,3.725 46.275,3.725 47.775,2.225 53.975,2.225 54.75,3 v1(56,3)
GDR: J1.2 Q1.1 R1.1 | length 14
  Top Layer w0.25: J1.2@59.5,5.75 59.5,6.4 59.94,6.84 62.09,6.84 63.25,8 63.25,13.2 62,14.45 62,14.55 61.75,14.8 61.65,14.8 61.3,15.15 Q1.1
GND: C1.2 C2.2 C3.2 C4.2 C5.2 C6.2 C7.2 C8.2 C9.2 C10.2 C11.2 C13.2 C14.1 C15.1 C16.1 C17.1 C18.2 C19.1 C20.1 C21.1 C22.2 C23.2 C24.1 C26.1 C27.1 C28.1 C29.2 D1.2 J1.8 J1.17 LED3.2 LED4.2 P1.2 P3.1 P4.1 P5.1 P6.5 P7.16 Q3.2 R1.2 R2.2 R5.1 R7.1 R8.2 TF1.6 TF1.9 TF1.10 TF1.11 TF1.12 TF1.13 U1.11 U2.4 U3.2 U4.11 U4.32 U4.62 U4.81 U4.99 | length 118.4
  Top Layer w0.25: v1(19.5,30.75) C21.1 ; C24.1 21.507,27.607 22.097,27.607 22.49,28 v1(24.75,28) ; v1(30.75,18.5) 31,18.25 U4.62 31,15.446 31.146,15.3 31.15,15.3 31.4,15.05 C26.1 ; C29.2 32.1,33.957 32.5,33.557 U4.11 v1(32.5,31.75) ; v1(38,30.5) U4.99 40.057,30.5 40.457,30.1 C28.1 ; v1(38.25,21.5) U4.81 40.057,21.5 40.457,21.9 C27.1 ; v1(52,4) J1.17 ; J1.17@52,4.981 J1.17 ; J1.17@52,5.5 J1.17 ; J1.8@56.5,5.75 v1@56.5,6.7
  Top Layer w0.3: v1(8.75,11.5) 8.775,11.525 8.775,12.575 Q3.2 8.8,13.55 9.1,13.85 R7.1 R5.1@9.1,16.243 ; v1(10,42.5) LED3.2 ; v1(10.25,25.4) C23.2 ; v1(10.25,28.1) C22.2 ; v1(17.25,42.5) LED4.2 ; v1(24.75,13.25) C19.1 ; C27.1 41.25,22.75 v1(41.75,23.25) ; C28.1 41.275,30.075 41.275,29.225 v1(41.3,29.2) ; v1(41.5,11.25) 41.5,11.358 41.675,11.533 U1.11 ; v1(48.65,27.4) TF1.9
  Top Layer w0.5: C14.1 v1(16.35,8.825) ; C17.1 v1(16.35,8.825) ; v1(19.5,28.25) 17.5,30.25 17.5,33.25 v1(16.25,34.5) 14.25,34.5 12.185,32.435 12.196,32.423 10.25,30.477 v1(10.25,28.1) v1(10.25,25.4) 10.25,22.75 13.25,19.75 14.25,18.75 16,18.75 17.106,19.856 17.106,20.606 v1(21.75,25.25) ; R8.2 19.8,6.325 19.6,6.525 v1(19.6,6.625) U3.2 v1(19.6,8.825) ; C16.1 22.123,11.325 21.923,11.125 19.7,11.125 v1(19.6,11.025) v1(19.6,9.925) v1(19.6,8.825) ; U2.4 31.155,6.601 31.25,6.696 v1(31.25,6.75) ; v1(33,6.6) C13.2 ; C18.2 34.125,12.525 34.621,12.525 34.946,12.2 v1(35,12.2) ; v1@44.904,9.9 C8.2 ; C7.2@47.675,10.025 47.55,9.9 C7.2 47.5,10.499 47.793,10.792 v1(49.25,10.792) C6.2 ; v1(47.75,30.75) 47.75,30.804 47.85,30.904 C15.1 ; v1(49,25.75) 49.054,25.75 49.404,26.1 TF1.10 ; TF1.6 v1(51.45,30.7) ; C5.2 v1(51,10.792) ; C4.2 v1(52.75,10.792) ; C3.2 v1(54.5,10.792) ; C2.2 v1(56.25,10.792) ; C1.2 v1(58,10.792) ; C11.2 v1(59.75,10.792) ; C9.2 v1(61,12.25) ; C10.2 v1(61.5,10.792) ; v1(16.35,8.825) v1(19.6,8.825)
  Top Layer w0.6: D1.2 v1@49.821,12.175
  Top Layer w0.7: R1.2 v1(64.15,14.5) ; R2.2 v1(64.15,16.45)
  Top Layer w0.75: v1(41.75,23.25) v1(41.75,25.75) C20.1
  other v1: 10.1,4.6 56.5,6.8 44.9,9.9 1,10.3 49.95,12.15 25.3,14.3 39.6,16.9 48.6,18.9 53.7,18.9 58.6,18.9 63.8,18.9 18.25,21.75 10.3,22.7 0.9,22.9 27.8,22.9 33.1,23.1 64,25.25 37.7,26.2 53.5,26.25 58,26.25 28.2,26.6 32.9,26.6 10.2,30.5 28.1,31.2 53.5,31.25 58.5,31.25 64,31.25 12.25,32.5 24.25,32.75 10.6,32.9 39.9,33.2 12.3,34.3 0.9,35.6 45.5,35.6 53.5,36.75 58.5,36.75 64,36.75 42.8,37.6 49,37.75 49,42.25 53.5,42.25 58,42.25 64,42.25 4,42.9 25.3,43.1
MISO: P7.11 U1.14 U4.22 | length 90.5
  Top Layer w0.25: P7.11 4.475,19.075 4.475,30.532 4.988,31.044 4.988,32.83 6.75,34.593 v1(6.75,36.5) ; v1(26.75,36.5) 26.75,36.378 27,36.128 U4.22
  Top Layer w0.3: v1(39,15.75) 39,15.642 39.2,15.442 39.2,15.419 39.725,14.894 U1.14
  Bottom Layer w0.25: P7.11 6.08,20.68 12.006,20.68 12.786,19.9 34.981,19.9 38.8,16.081 38.8,16.058 39,15.858 v1(39,15.75) ; v1(6.75,36.5) 7.404,36.5 7.429,36.475 8.071,36.475 8.096,36.5 8.831,36.5 9.606,37.275 19.389,37.275 19.439,37.225 25.328,37.225 26.028,36.525 26.725,36.525 v1(26.75,36.5)
MOSI: P7.12 U1.15 U4.21 | length 94.2
  Top Layer w0.25: P7.12 4.975,17.035 4.975,30.325 5.488,30.837 5.488,32.184 7.75,34.447 v1(7.75,37.25) ; U4.21 27.5,35.641 27.525,35.666 27.525,36.821 27.5,36.846 v1(27.5,37.25)
  Top Layer w0.3: v1(38,15.75) 38,15.642 38.2,15.442 38.2,15.419 39.075,14.544 U1.15
  Bottom Layer w0.25: P7.12 8.12,20.18 11.799,20.18 12.579,19.4 34.446,19.4 38,15.846 v1(38,15.75) ; v1(7.75,37.25) 8.154,37.25 8.179,37.225 8.821,37.225 9.371,37.775 20.343,37.775 20.393,37.725 25.535,37.725 25.985,37.275 27.475,37.275 v1(27.5,37.25)
NetC2_1: C2.1 J1.18 | length 6.2
  Top Layer w0.25: J1.18@51.5,5.75 51.5,6.269 51.756,6.525 51.775,6.525 52.6,7.35 54.95,7.35 55.5,7.9 56.2,8.6 C2.1
NetC3_1: C3.1 J1.19 | length 5.1
  Top Layer w0.25: J1.19@51,5.75 51,6.269 51,6.476 52.374,7.85 53.7,7.85 54.45,8.6 C3.1
NetC4_1: C4.1 J1.20 | length 4
  Top Layer w0.25: J1.20@50.5,5.75 50.5,6.683 52.2,8.383 52.533,8.383 C4.1
NetC6_1: C6.1 J1.22 | length 3.3
  Top Layer w0.25: C6.1 49.25,7 49.5,6.75 J1.22
NetC8_1: C8.1 J1.24 | length 4.4
  Top Layer w0.25: C8.1 45.8,8.6 47.075,7.325 48.5,5.9 J1.24
NetC10_1: C10.1 J1.4 | length 4.8
  Top Layer w0.25: J1.4@58.5,5.75 58.5,6.814 59.526,7.84 60.74,7.84 61.2,8.3 61.2,8.35 61.45,8.6 C10.1
NetC11_1: C11.1 J1.5 | length 3.7
  Top Layer w0.25: J1.5@58,5.75 58,7.021 59.329,8.35 59.45,8.35 59.7,8.6 C11.1
NetC12_1: C12.1 D1.1 D2.2 | length 6.4
  Top Layer w0.7: D2.2 46.7,13 47.3,13.6 48.1,13.6 48.95,14.45 D1.1 48.95,16.6 49.3,16.95 C12.1
NetC12_2: C12.2 D3.1 L1.2 Q1.3 | length 7.9
  Top Layer w0.7: C12.2 50.6,16.95 51.2,16.35 D3.1 L1.2@53.546,15.325 ; L1.2 L1.2@55.125,15.5 ; L1.2@55.125,15.8 Q1.3
NetC16_2: C16.2 U3.4 | length 2.3
  Top Layer w0.3: U3.4 20.6,9.925 C16.2@22.85,9.925
NetC25_1: C25.1 P6.1 | length 4
  Top Layer w0.25: C25.1 29.75,42.5 30.25,42 P6.1 P6.1@32.15,41.85
NetLED1_1: LED1.1 R11.2 | length 1.8
  Top Layer w0.25: LED1.1 R11.2
NetLED2_1: LED2.1 R12.2 | length 1.8
  Top Layer w0.25: LED2.1 R12.2
NetLED3_1: LED3.1 R13.2 | length 2.1
  Top Layer w0.25: LED3.1 R13.2
NetLED4_1: LED4.1 R14.2 | length 2.1
  Top Layer w0.25: LED4.1 R14.2
NetQ2_1: Q2.1 Q3.3 R6.2 | length 5.2
  Top Layer w0.3: Q3.3 9.75,9.25 9,8.5 R6.2 9.65,7.65 9.95,7.95 Q2.1@11.125,7.95
NetQ3_1: Q3.1 R4.2 R7.2 | length 4
  Top Layer w0.3: Q3.1@10.7,12.35 10.7,13.55 10.4,13.85 R7.2 R4.2@12.148,14.5
NetR10_2: R10.2 U2.7 | length 3.5
  Top Layer w0.3: U2.7 28.615,11.865 29,12.25 29.45,12.25 30.4,13.2 R10.2
PREVGH: C5.1 D3.2 J1.21 | length 7.7
  Top Layer w0.25: J1.21@50,5.75 50,7.1
  Top Layer w0.4: 50,7.1 50,7.65 50.95,8.6 C5.1 ; C5.1@51.05,8.6 51.525,9.075 51.578,9.075 51.875,9.372 51.875,11.525 51.3,12.1 51.125,12.1 D3.2
PREVGL: C7.1 D2.1 J1.23 | length 11.1
  Top Layer w0.25: 48.925,6.45 49,6.375 J1.23@49,6
  Top Layer w0.4: D2.1 46.7,14.131 45.7,13.131 45.7,11.55 46.625,10.625 46.625,9.372 46.922,9.075 46.975,9.075 47.45,8.6 C7.1 ; C7.1@47.575,8.575 47.575,7.8 48.925,6.45
RESE: J1.3 Q1.2 R2.1 | length 16.8
  Top Layer w0.25: J1.3@59,5.75 59,6.607 59.733,7.34 61.538,7.34 62.3,8.103 62.3,12.45 61.5,13.25 60.95,13.25 59.525,14.675 59.525,15.925 59.875,16.275 60.225,16.275 Q1.2
  Top Layer w0.6: Q1.2 R2.1
RESET: C21.2 C25.2 D5.1 P7.14 R17.1 U4.30 | length 59.9
  Top Layer w0.25: P7.14 5.975,12.955 5.975,29.911 6.582,30.518 6.582,31.082 v1(7.25,31.75) ; D5.1@21.65,34.325 R17.1 21.675,32.475 21.675,31.675 v1(21.7,31.65) 21.7,30.75 21.7,30.05 22.75,29 U4.30 ; v1(21.75,41) 21.714,40.964 21.714,34.389 D5.1 ; C25.2 27.25,42.35 v1(27.25,41.05)
  Bottom Layer w0.25: v1(7.25,31.75) 7.336,31.664 7.608,31.664 7.621,31.65 v1(21.7,31.65) ; v1(21.75,41) 21.775,41.025 27.225,41.025 v1(27.25,41.05)
RXD: LED1.2 P6.2 R15.2 | length 5.3
  Top Layer w0.25: R15.2 34.1,38.85 LED1.2 33.95,39.95 34.5,40.5 34.5,41.96 P6.2
SCLK: P7.13 U1.16 U4.20 | length 98.6
  Top Layer w0.25: P7.13 5.475,14.995 5.475,30.118 5.988,30.63 5.988,31.977 8.5,34.49 8.5,36.904 8.525,36.929 8.525,37.571 8.5,37.596 v1(8.5,38) ; U4.20 28,35.434 28.275,35.709 28.275,37.975 v1(28.25,38)
  Top Layer w0.3: v1(37,15.75) 37,15.642 37.2,15.442 37.2,15.419 38.425,14.194 U1.16
  Bottom Layer w0.25: P7.13 5.7,15.22 5.7,16.45 8.525,19.275 11.997,19.275 12.372,18.9 29.1,18.9 30.475,17.525 34.735,17.525 34.76,17.5 35.381,17.5 36.8,16.081 v1@36.8,15.75 ; v1(8.5,38) 8.596,38 8.871,38.275 20.551,38.275 20.601,38.225 26.592,38.225 26.792,38.025 27.821,38.025 27.846,38 v1(28.25,38)
SD_CS: TF1.2 U1.8 | length 36.8
  Top Layer w0.25: U1.8 40.375,5.971 40.571,5.775 41.892,5.775 42.2,6.083 42.2,7.604 42.45,7.854 42.45,15.68 43.6,16.83 43.6,16.862 45.125,18.387 45.125,32.989 47.236,35.1 TF1.2
SPIRAM_CS: U1.9 U2.1 | length 21.9
  Top Layer w0.25: v1(26.75,8.5) 27.345,7.905 U2.1 ; v1(40,10) 40,9.346 40.025,9.321 40.025,8.729 41.025,7.729 U1.9
  Bottom Layer w0.25: v1(26.75,8.5) 29.45,11.2 34.446,11.2 34.775,10.871 34.775,10.825 35.325,10.275 38.532,10.275 38.807,10 v1(40,10)
SS: U4.19
TXD: LED2.2 P6.3 R16.2 | length 7.6
  Top Layer w0.25: P6.3 38.058,41.022 38.824,41.022 39.562,40.284 39.562,39.887 LED2.2 40.125,38.675 40.125,38.525 38.65,37.05 R16.2
VCC: C14.2 C18.1 Q2.3 U1.19 U3.1 | length 26
  Top Layer w0.3: v1(34,10.4) C18.1 36.049,11.35 36.475,11.776 U1.19
  Top Layer w0.5: U3.1@18.605,7.63 U3.1
  Bottom Layer w0.3: v1(14.75,6.5) 17.345,6.5 18.02,5.825 21.087,5.825 21.562,6.3 25.783,6.3 28,8.517 28,8.631 29.769,10.4 v1(34,10.4)
VCC_EN: R3.1 R5.2 R8.1 U3.3 | length 25.3
  Top Layer w0.25: R5.2 v1(11.25,16.25) R3.1 ; v1(22.1,16.2) 22.1,13.372 24.45,11.022
  Top Layer w0.3: U3.3 20.6,7.725 R8.1@22.85,7.725 ; R8.1 22.9,7.625 23.607,8.332 23.968,8.332 24.45,8.814 24.45,11.022
  Bottom Layer w0.25: v1(11.25,16.25) 11.275,16.225 22.075,16.225 v1(22.1,16.2)
XTAL1: C23.1 R18.2 U4.34 Y1.2 | length 15.9
  Top Layer w0.25: C23.1 Y1.2@15.1,24.1 ; Y1.2@15.25,21.801 Y1.2 15.25,24.75 16.35,25.85 R18.2 19.8,25.85 20.05,26.1 20.05,26.104 20.196,26.25 22.154,26.25 22.904,27 U4.34
XTAL2: C22.1 R18.1 U4.33 Y1.1 | length 16.2
  Top Layer w0.25: C22.1 14.825,29.4 Y1.1@15.25,29.825 ; Y1.1 Y1.1@15.25,29.825 ; R18.1 16.6,27.15 15.25,28.5 Y1.1@15.25,29.825 ; R18.1@20.05,27.15 20.05,26.896 20.196,26.75 21.947,26.75 22.697,27.5 U4.33
pads on no net: J1. J1.1 J1.6 J1.7 LED1.0 LED2.0 LED3.0 LED4.0 TF1.1 TF1.8 TF1.27 TF1.28 U2.3 U4.4 U4.8 U4.9 U4.14 U4.27 U4.28 U4.29 U4.47 U4.48 U4.49 U4.65 U4.66 U4.67 U4.68 U4.69 U4.79

## Polygon pours and split planes (outlines as drawn)
VCC on Top Layer "dir" (solid, remove dead copper, pour order 2): 12.275,8.275 12,8 12,5.5 12.525,4.975 19.1,4.975 19.9,5.775 19.9,7.95 19.575,8.275
3.3V on Top Layer "dir" (solid, remove dead copper, pour order 1): 16.5,9.375 15.1,10.775 15.1,13.675 15.7,14.275 18.475,14.275 19.25,13.5 19.25,9.375
GND on Top Layer "dir" (solid, remove dead copper, pour order 3): 0,18.25 0,44 65,44 65,18.25 44.25,18.25 44.25,0 0,0
GND on Bottom Layer "dir" (solid, remove dead copper, pour order 0): 0,44 65,44 65,0 0,0

## Keep-outs
Top Layer:
  lines w0.05: 1.022,6.845 1.022,36.71 ; 6.149,39.207 6.707,38.65 8.414,38.65 ; 9.106,38.251 9.149,38.251 ; 11.9,35.5 9.168,38.232 ; 12.018,0.95 14.282,0.95 ; 13.3,34.1 13.6,34.1 ; 16.5,34.25 17.25,33.5 ; 17.9,41.8 19.05,41.8 19.1,41.75 ; 23.785,1.022 25.515,1.022 ; 23.989,17.044 23.989,18.006 24.394,18.411 ; 30.687,6.403 30.687,7.287 31.4,8 33,8 ; 33.05,43.05 33.05,43.15 33.4,43.5 ; 34.945,42.978 39.41,42.978 ; 40.3,17.2 39.1,18.4 ; 42.257,4.088 43.712,4.088 44.3,3.5 ; 9.168,38.232 9.168,38.232 ; 39.1,18.4 39.1,18.4 ; 21.5,25.75 21.5,25.75
Bottom Layer:
  lines w0.05: 0.95,11.658 0.95,21.818 ; 0.95,29.438 0.95,31.363 ; 1.022,37.325 1.022,40.878 ; 2.645,36.08 3.685,36.08 5.1,34.664 ; 12.285,2.978 16.555,2.978 ; 13.1,14.1 14.922,12.278 ; 23.785,2.978 28.25,2.978 ; 40.8,1.355 40.8,0.8 41.3,0.3 ; 64.05,21.35 64.05,22.902

## Other copper
Top Layer:
  region net VCC_EN: 24,8.675 20.25,8.675 20.25,7.075 24,7.075
  region net NetC16_2: 24,10.575 20.25,10.575 20.25,9 24,9
  region net GND: 19.95,11.375 19.25,11.375 19.25,5.575 19.95,5.575
  pour cut-out: 22.483,16 17,16 10.25,22.75 10.25,31.75 13.8,35.3 17.7,35.3 22.483,30.517

## Silkscreen, mask and mechanical layers (free items; w line width, h text height)
Top Overlay:
  lines w0.2: 44.8,11 44,11.8 44,20 ; 44,20 44,20.6 44,23.4 59.5,23.4 59.5,20.7 59.5,20 44,20
  text "D4" at 3.95,41.46 h1
  text "D5" at 3.95,38.92 h1
  text "Panel Driver" at 6.742,37.313 h2.5
  text "D6" at 3.95,36.38 h1
  text "Rev: 2.0" at 6.779,35.268 h2
  text "D7" at 3.95,33.84 h1
  text "D8" at 3.95,31.3 h1
  text "D9" at 3.95,28.76 h1
  text "D10" at 3.95,26.22 h1
  text "D11" at 3.95,23.68 h1
  text "D14" at 3.95,21.14 h1
  text "INT" at 61,18.99 h1 r90
  text "D15" at 3.95,18.6 h1
  text "MISO" at 3.95,16.06 h1
  text "MOSI" at 3.95,13.52 h1
  text "SCLK" at 3.95,10.98 h1
  text "RST" at 3.95,8.44 h1
  text "+5V" at 3.95,5.9 h1
  text "GND" at 3.95,4 h1
  text "I2C1" at 12.95,4 h1
  text "I2C2" at 21.87,4 h1
  text "I2C3" at 35.7,4 h1
Board Shape:
  the board outline again, w0.2
Dimentions:
  the board outline again, w0.5

## Dimensions
0,44 to 65,0 on Dimentions
0,44 to 0,0 on Dimentions